# Altium PCB GTU-V1.0-20160325 .PcbDoc (part 4 of 5)
Units mil, origin at the board's own origin, x right, y up, seen from the top; angles counter-clockwise.
Board outline 6299.21 x 4330.71 mil, 4 copper layers (Top Layer, POWER, GND, Bottom Layer); 208 components, 165 nets, 695 pads, 348 vias.
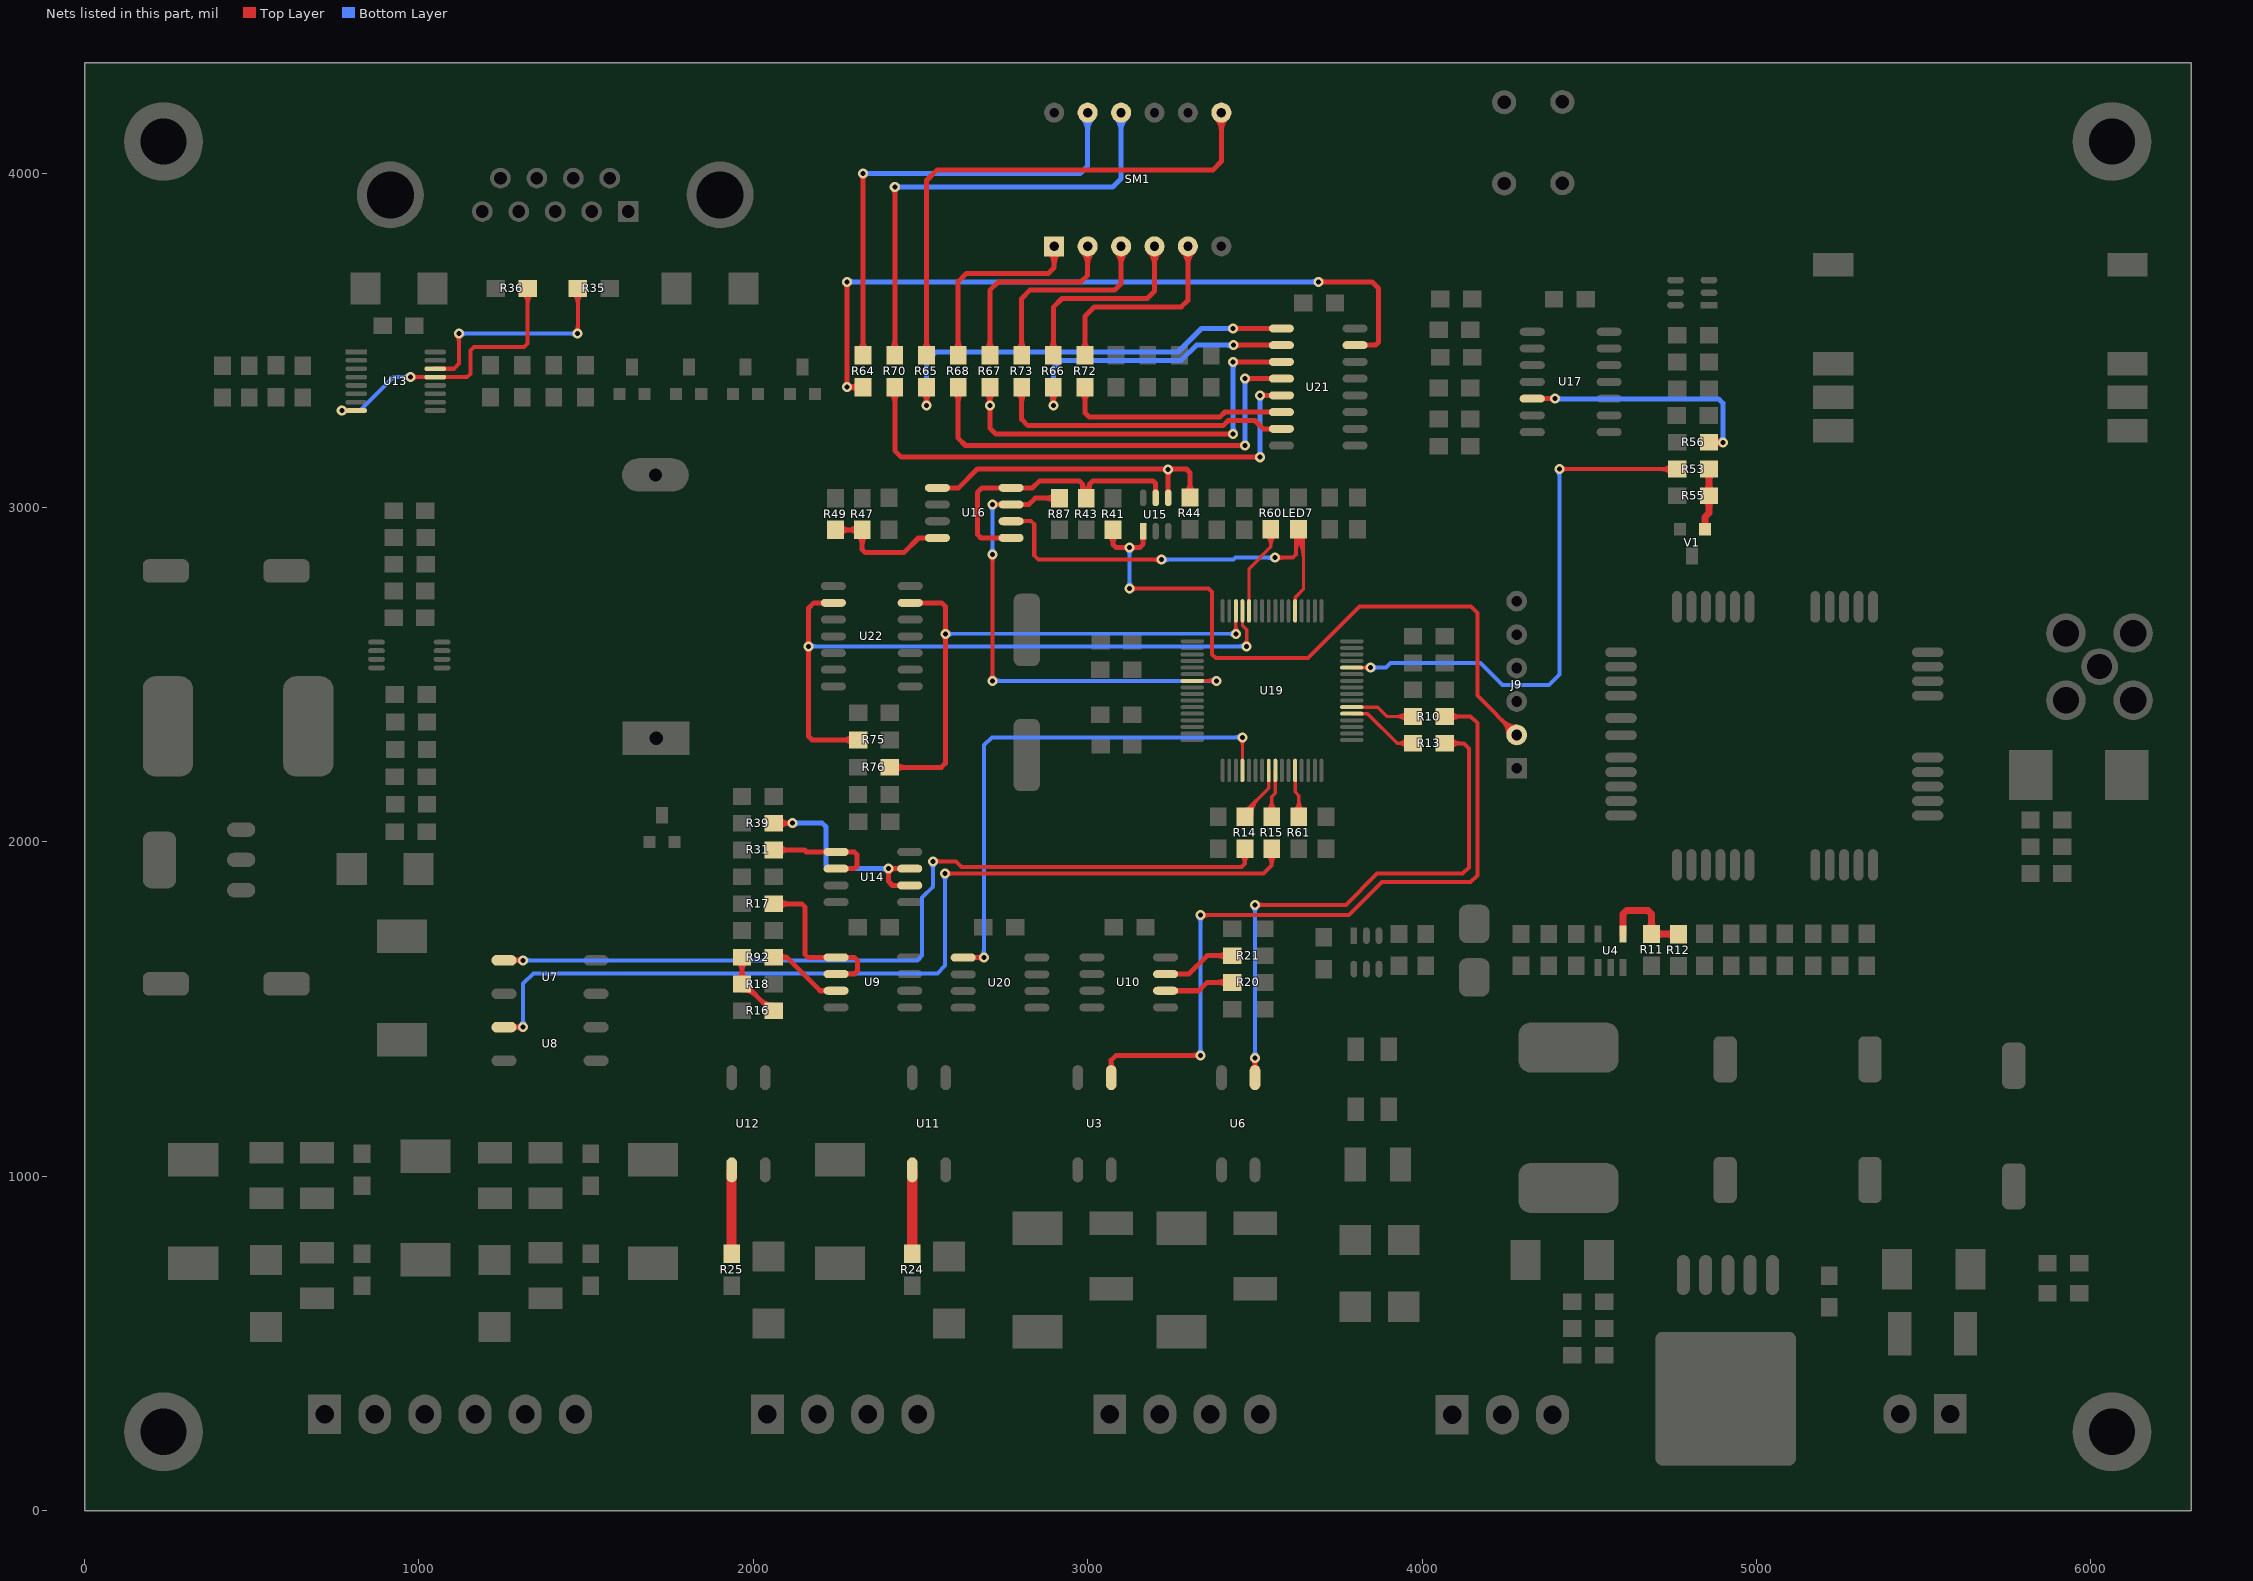
[diagram p6: the nets of this part, all layers, seen from the top]

## Via types
v1: diameter 30, hole 15, Top Layer to Bottom Layer, 262 vias
v2: diameter 40, hole 20, Top Layer to Bottom Layer, 36 vias
v3: diameter 40, hole 40, Top Layer to Bottom Layer, 16 vias
v4: diameter 80, hole 40, Top Layer to Bottom Layer, 12 vias
v5: diameter 60, hole 30, Top Layer to Bottom Layer, 11 vias
v6: diameter 50, hole 25, Top Layer to Bottom Layer, 10 vias
v7: diameter 70, hole 35, Top Layer to Bottom Layer, 1 vias

## Nets (pads, with @x,y where several pads share a name; then routed paths per layer and width w, separated by ;. In a path a pad name is that pad's centre, name@x,y a point inside that pad or via, vN(x,y) a via of type N, cw(c..) or ccw(c..) an arc to the next point about the centre after c; other vN are vias at no path point) (continued)
NetR10_2: R10.2 U3.1 | length 2653.3
  Top Layer w12: v1(3337,1781) 3781,1781 3880,1880 4145,1880 4165,1900 4165,2355 4145,2375 R10.2@4067.6,2375 ; 3358.73,1781 cw(c3358.73,1802.73) 3343.36,1787.36 ccw(c3358.73,1802.73) 3358.73,1781 ; 3358.73,1781 ccw(c3358.73,1759.27) 3343.36,1774.64 cw(c3358.73,1759.27) 3358.73,1781 ; 4115.97,2375 cw(c4115.97,2420.87) 4083.53,2388.44 ccw(c4115.97,2420.87) 4115.97,2375 ; 4115.97,2375 ccw(c4115.97,2329.13) 4083.53,2361.56 cw(c4115.97,2329.13) 4115.97,2375
  Top Layer w15: U3.1@3070.21,1295 3070.21,1347.21 3085,1362 v1(3337,1362) ; 3070.21,1337.02 cw(c3049.69,1337.02) 3064.2,1322.51 ccw(c3049.69,1337.02) 3070.21,1337.02 ; 3070.21,1337.02 ccw(c3090.73,1337.02) 3076.22,1322.51 cw(c3090.73,1337.02) 3070.21,1337.02 ; 3318.89,1362 cw(c3318.89,1343.89) 3331.7,1356.7 ccw(c3318.89,1343.89) 3318.89,1362 ; 3318.89,1362 ccw(c3318.89,1380.11) 3331.7,1367.3 cw(c3318.89,1380.11) 3318.89,1362
  Bottom Layer w12: v1(3337,1362) v1@3337,1782 ; 3337,1383.73 cw(c3315.27,1383.73) 3330.64,1368.36 ccw(c3315.27,1383.73) 3337,1383.73 ; 3337,1383.73 ccw(c3358.73,1383.73) 3343.36,1368.36 cw(c3358.73,1383.73) 3337,1383.73 ; 3337,1759.27 cw(c3358.73,1759.27) 3343.36,1774.64 ccw(c3358.73,1759.27) 3337,1759.27 ; 3337,1759.27 ccw(c3315.27,1759.27) 3330.64,1774.64 cw(c3315.27,1759.27) 3337,1759.27
NetR11_2: R11.2 R12.1 U4.5 | length 635.3
  Top Layer w20: U4.5@4600.83,1724.78 4600.83,1784.78 4610.83,1794.78 4675.83,1794.78 4685.83,1784.78 R11.2@4685.83,1724.78 4765.44,1724.78 R12.1@4766.21,1724 ; 4685.83,1763.49 cw(c4649.61,1763.49) 4675.22,1737.88 ccw(c4649.61,1763.49) 4685.83,1763.49 ; 4685.83,1763.49 ccw(c4722.04,1763.49) 4696.43,1737.88 cw(c4722.04,1763.49) 4685.83,1763.49 ; 4722.04,1724.78 cw(c4722.04,1760.99) 4696.43,1735.38 ccw(c4722.04,1760.99) 4722.04,1724.78 ; 4722.04,1724.78 ccw(c4722.04,1688.56) 4696.43,1714.17 cw(c4722.04,1688.56) 4722.04,1724.78 ; 4728.13,1724.78 cw(c4728.13,1685.91) 4755.61,1713.39 ccw(c4728.13,1685.91) 4728.13,1724.78 ; 4731.87,1724.78 ccw(c4731.87,1758.34) 4755.61,1734.61 cw(c4731.87,1758.34) 4731.87,1724.78
NetR13_2: R13.2 U6.1 | length 2108
  Top Layer w12: v1(3500.21,1812) 3772,1812 3865,1905 4121,1905 4140,1924 4140,2280 4125,2295 R13.2@4067.6,2295 ; 3521.94,1812 cw(c3521.94,1833.73) 3506.58,1818.36 ccw(c3521.94,1833.73) 3521.94,1812 ; 3521.94,1812 ccw(c3521.94,1790.27) 3506.58,1805.64 cw(c3521.94,1790.27) 3521.94,1812 ; 4115.97,2295 cw(c4115.97,2340.87) 4083.53,2308.44 ccw(c4115.97,2340.87) 4115.97,2295 ; 4115.97,2295 ccw(c4115.97,2249.13) 4083.53,2281.56 cw(c4115.97,2249.13) 4115.97,2295
  Top Layer w15: U6.1@3500.21,1295 v1(3500.21,1354) ; 3500.21,1335.89 cw(c3518.32,1335.89) 3505.52,1348.7 ccw(c3518.32,1335.89) 3500.21,1335.89 ; 3500.21,1335.89 ccw(c3482.11,1335.89) 3494.91,1348.7 cw(c3482.11,1335.89) 3500.21,1335.89 ; 3500.21,1337.02 cw(c3479.69,1337.02) 3494.2,1322.51 ccw(c3479.69,1337.02) 3500.21,1337.02 ; 3500.21,1337.02 ccw(c3520.73,1337.02) 3506.22,1322.51 cw(c3520.73,1337.02) 3500.21,1337.02
  Bottom Layer w12: v1(3500.21,1354) v1(3500.21,1812) ; 3500.21,1375.73 cw(c3478.48,1375.73) 3493.85,1360.36 ccw(c3478.48,1375.73) 3500.21,1375.73 ; 3500.21,1375.73 ccw(c3521.94,1375.73) 3506.58,1360.36 cw(c3521.94,1375.73) 3500.21,1375.73 ; 3500.21,1790.27 cw(c3521.94,1790.27) 3506.58,1805.64 ccw(c3521.94,1790.27) 3500.21,1790.27 ; 3500.21,1790.27 ccw(c3478.48,1790.27) 3493.85,1805.64 cw(c3478.48,1790.27) 3500.21,1790.27
NetR14_2: R14.2 U7.1 | length 2995.1
  Top Layer w12: v1(2537,1942) 2606,1942 2623,1925 3460,1925 3470,1935 ; R14.2@3470,1980 3470,1935 ; 2558.73,1942 cw(c2558.73,1963.73) 2543.36,1948.36 ccw(c2558.73,1963.73) 2558.73,1942 ; 2558.73,1942 ccw(c2558.73,1920.27) 2543.36,1935.64 cw(c2558.73,1920.27) 2558.73,1942 ; 3470,1935 cw(c3508.03,1935) 3482.67,1963.34 ccw(c3508.03,1935) 3470,1935 ; 3470,1935 ccw(c3431.97,1935) 3457.33,1963.34 cw(c3431.97,1935) 3470,1935
  Top Layer w15: U7.1@1254.21,1646 v1(1311,1646) ; 1292.89,1646 cw(c1292.89,1627.89) 1305.7,1640.7 ccw(c1292.89,1627.89) 1292.89,1646 ; 1292.89,1646 ccw(c1292.89,1664.11) 1305.7,1651.3 cw(c1292.89,1664.11) 1292.89,1646 ; v1@1296.23,1646 cw(c1296.23,1666.52) 1281.72,1652.01 ccw(c1296.23,1666.52) v1@1296.23,1646 ; v1@1296.23,1646 ccw(c1296.23,1625.48) 1281.72,1639.99 cw(c1296.23,1625.48) v1@1296.23,1646
  Bottom Layer w12: v1(1311,1646) 2491,1646 2505,1660 2505,1834 2537,1866 v1(2537,1942) ; 1332.73,1646 cw(c1332.73,1667.73) 1317.36,1652.36 ccw(c1332.73,1667.73) 1332.73,1646 ; 1332.73,1646 ccw(c1332.73,1624.27) 1317.36,1639.64 cw(c1332.73,1624.27) 1332.73,1646 ; 2537,1920.27 cw(c2558.73,1920.27) 2543.36,1935.64 ccw(c2558.73,1920.27) 2537,1920.27 ; 2537,1920.27 ccw(c2515.27,1920.27) 2530.64,1935.64 cw(c2515.27,1920.27) 2537,1920.27
NetR15_2: R15.2 U8.1 | length 3252.7
  Top Layer w12: v1@2575,1905 3525,1905 3550,1930 R15.2@3550,1980 ; 3550,1931.63 cw(c3595.87,1931.63) 3563.44,1964.06 ccw(c3595.87,1931.63) 3550,1931.63 ; 3550,1931.63 ccw(c3504.13,1931.63) 3536.56,1964.06 cw(c3504.13,1931.63) 3550,1931.63 ; v1@2579.36,1899.64 cw(c2592.31,1886.69) 2592.31,1905 ccw(c2592.31,1886.69) v1@2579.36,1899.64 ; v1@2579.36,1912.36 ccw(c2597.14,1930.14) 2597.14,1905 cw(c2597.14,1930.14) v1@2579.36,1912.36
  Top Layer w15: U8.1@1254.21,1446 v1(1311,1446) ; 1292.89,1446 cw(c1292.89,1427.89) 1305.7,1440.7 ccw(c1292.89,1427.89) 1292.89,1446 ; 1292.89,1446 ccw(c1292.89,1464.11) 1305.7,1451.3 cw(c1292.89,1464.11) 1292.89,1446 ; v1@1296.23,1446 cw(c1296.23,1466.52) 1281.72,1452.01 ccw(c1296.23,1466.52) v1@1296.23,1446 ; v1@1296.23,1446 ccw(c1296.23,1425.48) 1281.72,1439.99 cw(c1296.23,1425.48) v1@1296.23,1446
  Bottom Layer w12: v1(1311,1446) 1311,1576 1342,1607 2550,1607 2573,1630 v1(2573,1906) ; 1311,1467.73 cw(c1289.27,1467.73) 1304.64,1452.36 ccw(c1289.27,1467.73) 1311,1467.73 ; 1311,1467.73 ccw(c1332.73,1467.73) 1317.36,1452.36 cw(c1332.73,1467.73) 1311,1467.73 ; 2573,1884.27 cw(c2594.73,1884.27) 2579.36,1899.64 ccw(c2594.73,1884.27) 2573,1884.27 ; 2573,1884.27 ccw(c2551.27,1884.27) 2566.64,1899.64 cw(c2551.27,1884.27) 2573,1884.27
NetR16_1: R16.1 R18.2 R92.2 | length 739.1
  Top Layer w15: R18.2@1966.21,1575 R92.2@1966.21,1655 ; R18.2@1966.21,1583 R16.1@2046.21,1503 ; R16.1@2046.21,1495 R16.1@2061.21,1495 ; 1966.21,1612.75 cw(c2008.46,1612.75) 1978.59,1642.63 ccw(c2008.46,1612.75) 1966.21,1612.75 ; 1966.21,1612.75 ccw(c1923.96,1612.75) 1953.84,1642.63 cw(c1923.96,1612.75) 1966.21,1612.75 ; 1966.21,1617.25 cw(c1923.96,1617.25) 1953.84,1587.37 ccw(c1923.96,1617.25) 1966.21,1617.25 ; 1966.21,1617.25 ccw(c2008.46,1617.25) 1978.59,1587.37 cw(c2008.46,1617.25) 1966.21,1617.25 ; R18.2@1968.71,1557.5 cw(c1968.71,1501.97) 2007.98,1541.24 ccw(c1968.71,1501.97) R18.2@1968.71,1557.5 ; R18.2@1986.21,1575 ccw(c2015.18,1575) 1994.7,1554.51 cw(c2015.18,1575) R18.2@1986.21,1575 ; 2021.16,1528.06 ccw(c2058.71,1565.61) 2058.71,1512.5 cw(c2058.71,1565.61) 2021.16,1528.06 ; 2032.02,1517.19 cw(c2009.83,1495) 2041.21,1495 ccw(c2009.83,1495) 2032.02,1517.19
NetR17_1: R17.1 U9.1 U9.2 | length 634.8
  Top Layer w15: R17.1@2061.21,1815 2145,1815 2154,1806 2154,1664 2163,1655 2302,1655 2311,1646 2311,1614 2302,1605 U9.2@2247.6,1605 ; 2105.96,1815 cw(c2105.96,1857.25) 2076.09,1827.37 ccw(c2105.96,1857.25) 2105.96,1815 ; 2105.96,1815 ccw(c2105.96,1772.75) 2076.09,1802.63 cw(c2105.96,1772.75) 2105.96,1815
NetR20_2: R20.2 U10.6 | length 343.1
  Top Layer w15: U10.6@3232.6,1555 3332,1555 3357,1580 R20.2@3432.6,1580 ; 3387.85,1580 cw(c3387.85,1537.75) 3417.72,1567.63 ccw(c3387.85,1537.75) 3387.85,1580 ; 3387.85,1580 ccw(c3387.85,1622.25) 3417.72,1592.37 cw(c3387.85,1622.25) 3387.85,1580
NetR21_2: R21.2 U10.7 | length 355.5
  Top Layer w15: U10.7@3232.6,1605 3302,1605 3357,1660 R21.2@3432.6,1660 ; 3387.85,1660 cw(c3387.85,1617.75) 3417.72,1647.63 ccw(c3387.85,1617.75) 3387.85,1660 ; 3387.85,1660 ccw(c3387.85,1702.25) 3417.72,1672.37 cw(c3387.85,1702.25) 3387.85,1660
NetR24_2: R24.2 U11.1 | length 251.4
  Top Layer w30: R24.2@2475.21,768 U11.1@2475.21,1019.41
NetR25_2: R25.2 U12.1 | length 251.4
  Top Layer w30: R25.2@1935.21,768 U12.1@1935.21,1019.41
NetR31_2: R31.2 U14.1 U14.2 | length 487
  Top Layer w15: R31.2@2061.21,1976 2153,1976 2159,1970 2302,1970 2310,1962 2310,1928 2302,1920 U14.2@2247.6,1920 ; 2105.96,1976 cw(c2105.96,2018.25) 2076.09,1988.37 ccw(c2105.96,2018.25) 2105.96,1976 ; 2105.96,1976 ccw(c2105.96,1933.75) 2076.09,1963.63 cw(c2105.96,1933.75) 2105.96,1976
NetR35_2: R35.2 U13.14 | length 1073.9
  Top Layer w12: U13.14@1048.71,3415 1104.21,3415 1119.21,3430 v1(1119.21,3520) ; v1@1475.21,3520 R35.2@1475.21,3655 ; 1119.21,3498.27 cw(c1140.94,3498.27) 1125.58,3513.64 ccw(c1140.94,3498.27) 1119.21,3498.27 ; 1119.21,3498.27 ccw(c1097.48,3498.27) 1112.85,3513.64 cw(c1097.48,3498.27) 1119.21,3498.27 ; 1475.21,3609.13 cw(c1521.08,3609.13) 1488.65,3641.56 ccw(c1521.08,3609.13) 1475.21,3609.13 ; 1475.21,3609.13 ccw(c1429.34,3609.13) 1461.78,3641.56 cw(c1429.34,3609.13) 1475.21,3609.13 ; v1@1467.85,3526.36 ccw(c1450.07,3544.14) 1475.21,3544.14 cw(c1450.07,3544.14) v1@1467.85,3526.36 ; 1475.21,3539.31 ccw(c1493.53,3539.31) 1480.58,3526.36 cw(c1493.53,3539.31) 1475.21,3539.31
  Bottom Layer w12: v1(1119.21,3520) v1(1474.21,3520) ; 1140.94,3520 cw(c1140.94,3541.73) 1125.58,3526.36 ccw(c1140.94,3541.73) 1140.94,3520 ; 1140.94,3520 ccw(c1140.94,3498.27) 1125.58,3513.64 cw(c1140.94,3498.27) 1140.94,3520 ; 1452.48,3520 cw(c1452.48,3498.27) 1467.85,3513.64 ccw(c1452.48,3498.27) 1452.48,3520 ; 1452.48,3520 ccw(c1452.48,3541.73) 1467.85,3526.36 cw(c1452.48,3541.73) 1452.48,3520
NetR36_2: R36.2 U13.8 U13.13 | length 1304.9
  Top Layer w12: v1(769.21,3290) U13.8@812.71,3290 ; v1(974.21,3390) 1144.21,3390 1154.21,3400 1154.21,3470 1164.21,3480 1314.21,3480 1325.21,3491 R36.2@1325.21,3655 ; U13.8@790.94,3290 cw(c790.94,3311.73) 775.58,3296.36 ccw(c790.94,3311.73) U13.8@790.94,3290 ; U13.8@790.94,3290 ccw(c790.94,3268.27) 775.58,3283.64 cw(c790.94,3268.27) U13.8@790.94,3290 ; 995.94,3390 cw(c995.94,3411.73) 980.58,3396.36 ccw(c995.94,3411.73) 995.94,3390 ; 995.94,3390 ccw(c995.94,3368.27) 980.58,3383.64 cw(c995.94,3368.27) 995.94,3390 ; 1325.21,3609.13 cw(c1371.08,3609.13) 1338.65,3641.56 ccw(c1371.08,3609.13) 1325.21,3609.13 ; 1325.21,3609.13 ccw(c1279.34,3609.13) 1311.78,3641.56 cw(c1279.34,3609.13) 1325.21,3609.13
  Bottom Layer w12: v1(769.21,3290) 824.21,3290 924.21,3390 v1(974.21,3390) ; 790.94,3290 cw(c790.94,3311.73) 775.58,3296.36 ccw(c790.94,3311.73) 790.94,3290 ; 790.94,3290 ccw(c790.94,3268.27) 775.58,3283.64 cw(c790.94,3268.27) 790.94,3290 ; 952.48,3390 cw(c952.48,3368.27) 967.85,3383.64 ccw(c952.48,3368.27) 952.48,3390 ; 952.48,3390 ccw(c952.48,3411.73) 967.85,3396.36 cw(c952.48,3411.73) 952.48,3390
NetR39_2: R39.2 U14.6 U14.7 | length 1053.8
  Top Layer w15: R39.2@2061.21,2056 v1(2117,2056) ; U14.6@2467.6,1870 2416,1870 2404,1882 v1(2404,1920) U14.7@2467.6,1920 ; 2098.89,2056 cw(c2098.89,2037.89) 2111.7,2050.7 ccw(c2098.89,2037.89) 2098.89,2056 ; 2098.89,2056 ccw(c2098.89,2074.11) 2111.7,2061.3 cw(c2098.89,2074.11) 2098.89,2056 ; v1@2105.96,2056 cw(c2105.96,2098.25) 2076.09,2068.37 ccw(c2105.96,2098.25) v1@2105.96,2056 ; v1@2105.96,2056 ccw(c2105.96,2013.75) 2076.09,2043.63 cw(c2105.96,2013.75) v1@2105.96,2056 ; 2404,1901.89 cw(c2422.11,1901.89) v1@2409.3,1914.7 ; 2404,1901.89 ccw(c2385.89,1901.89) 2398.7,1914.7 cw(c2385.89,1901.89) 2404,1901.89 ; 2404,1901.89 cw(c2422.11,1901.89) v1@2409.3,1914.7 ; v1@2409.3,1914.7 cw(c2422.11,1901.89) 2422.11,1920 ; v1@2409.3,1914.7 cw(c2422.11,1901.89) 2422.11,1920 ; 2422.11,1920 cw(c2422.11,1938.11) 2409.3,1925.3 ccw(c2422.11,1938.11) 2422.11,1920
  Bottom Layer w15: v1(2117,2056) 2206,2056 2217,2045 2217,1930 2227,1920 v1(2404,1920) ; 2135.11,2056 cw(c2135.11,2074.11) 2122.3,2061.3 ccw(c2135.11,2074.11) 2135.11,2056 ; 2135.11,2056 ccw(c2135.11,2037.89) 2122.3,2050.7 cw(c2135.11,2037.89) 2135.11,2056 ; 2385.89,1920 cw(c2385.89,1901.89) 2398.7,1914.7 ccw(c2385.89,1901.89) 2385.89,1920 ; 2385.89,1920 ccw(c2385.89,1938.11) 2398.7,1925.3 cw(c2385.89,1938.11) 2385.89,1920
NetR43_1: R43.1 U15.5 U16.5 U16.8 | length 1020.6
  Top Layer w15: U16.5@2770.6,2909 2681,2909 2670,2920 2670,3045 2684,3059 2835,3059 2856,3080 2975,3080 2985,3070 ; R43.1@2995.6,3028 2993.6,3030 2985,3030 2985,3070 ; R43.1@3010,3035 3005,3040 3005,3070 ; U15.5@3203.1,3029 3203.1,3071.9 3195,3080 3015,3080 3005,3070 ; 2985,3070 ccw(c3009.31,3070) 3001.34,3047.03 cw(c3009.31,3070) 2985,3070 ; 3005,3070 cw(c2980.05,3070) 2989.19,3046.78 ccw(c2980.05,3070) 3005,3070
NetR44_1: R44.1 U15.4 U16.1 | length 1245.8
  Top Layer w15: U16.1@2550.6,3059 2614,3059 2670,3115 3295,3115 3305.6,3104.4 R44.1@3305.6,3030 ; U15.4@3240.6,3029 v1(3240.6,3114.4) ; v1@3235.3,3109.1 ccw(c3221.05,3094.85) 3221.05,3115 cw(c3221.05,3094.85) v1@3235.3,3109.1 ; v1@3235.3,3109.1 cw(c3222.49,3096.3) 3240.6,3096.3 ; v1@3235.3,3109.1 cw(c3222.49,3096.3) 3240.6,3096.3 ; 3240.6,3096.3 cw(c3258.7,3096.3) v1@3245.9,3109.1 ; 3240.6,3096.3 cw(c3258.7,3096.3) v1@3245.9,3109.1 ; v1@3245.9,3109.1 cw(c3260.15,3094.85) 3260.15,3115 ccw(c3260.15,3094.85) v1@3245.9,3109.1 ; 3305.6,3074.75 cw(c3263.35,3074.75) 3293.22,3044.87 ccw(c3263.35,3074.75) 3305.6,3074.75 ; 3305.6,3074.75 ccw(c3347.85,3074.75) 3317.97,3044.87 cw(c3347.85,3074.75) 3305.6,3074.75 ; 3223.94,3115 ccw(c3223.94,3131.06) 3235.3,3119.7 cw(c3223.94,3131.06) 3223.94,3115 ; v1@3245.9,3119.7 ccw(c3257.26,3131.06) 3257.26,3115 cw(c3257.26,3131.06) v1@3245.9,3119.7
NetR47_1: R47.1 R49.2 U16.4 | length 783.9
  Top Layer w15: R49.2@2245.6,2933 R47.1@2325.6,2933 2325.6,2874.4 2335,2865 2450,2865 2494,2909 U16.4@2550.6,2909 ; 2283.35,2933 cw(c2283.35,2890.75) 2313.22,2920.63 ccw(c2283.35,2890.75) 2283.35,2933 ; 2283.35,2933 ccw(c2283.35,2975.25) 2313.22,2945.37 cw(c2283.35,2975.25) 2283.35,2933 ; 2287.85,2933 cw(c2287.85,2975.25) 2257.97,2945.37 ccw(c2287.85,2975.25) 2287.85,2933 ; 2287.85,2933 ccw(c2287.85,2890.75) 2257.97,2920.63 cw(c2287.85,2890.75) 2287.85,2933 ; 2325.6,2888.25 cw(c2367.85,2888.25) 2337.97,2918.13 ccw(c2367.85,2888.25) 2325.6,2888.25 ; 2325.6,2888.25 ccw(c2283.35,2888.25) 2313.22,2918.13 cw(c2283.35,2888.25) 2325.6,2888.25
NetR53_2: R53.2 R55.1 V1.1 | length 586.9
  Top Layer w20: V1.1@4845.6,2935 4845.6,2971.39 4857.6,2983.39 R53.2@4857.6,3115 ; 4845.6,2954.31 cw(c4826.28,2954.31) 4839.94,2940.66 ccw(c4826.28,2954.31) 4845.6,2954.31 ; 4845.6,2954.31 ccw(c4864.91,2954.31) 4851.26,2940.66 cw(c4864.91,2954.31) 4845.6,2954.31 ; 4857.6,2998.79 cw(c4893.81,2998.79) 4868.21,3024.39 ccw(c4893.81,2998.79) 4857.6,2998.79 ; 4857.6,2998.79 ccw(c4821.39,2998.79) 4846.99,3024.39 cw(c4821.39,2998.79) 4857.6,2998.79 ; 4857.6,3071.21 cw(c4821.39,3071.21) 4846.99,3045.61 ccw(c4821.39,3071.21) 4857.6,3071.21 ; 4857.6,3071.21 ccw(c4893.81,3071.21) 4868.21,3045.61 cw(c4893.81,3071.21) 4857.6,3071.21 ; 4857.6,3078.79 cw(c4893.81,3078.79) 4868.21,3104.39 ccw(c4893.81,3078.79) 4857.6,3078.79 ; 4857.6,3078.79 ccw(c4821.39,3078.79) 4846.99,3104.39 cw(c4821.39,3078.79) 4857.6,3078.79
NetR56_2: R56.2 U17.5 | length 1018.4
  Top Layer w15: U17.5@4329.21,3325.61 v1(4397.6,3325.61) ; 4379.49,3325.61 cw(c4379.49,3307.51) 4392.3,3320.31 ccw(c4379.49,3307.51) 4379.49,3325.61 ; 4379.49,3325.61 ccw(c4379.49,3343.72) 4392.3,3330.92 cw(c4379.49,3343.72) 4379.49,3325.61
  Top Layer w20: R56.2@4857.6,3195 v1(4899.21,3195) ; v1@4896.31,3195 cw(c4896.31,3231.21) 4870.71,3205.61 ccw(c4896.31,3231.21) v1@4896.31,3195 ; v1@4896.31,3195 ccw(c4896.31,3158.79) 4870.71,3184.39 cw(c4896.31,3158.79) v1@4896.31,3195
  Bottom Layer w15: v1@4397.6,3325 4886.21,3325 4899.21,3312 v1(4899.21,3195) ; 4899.21,3213.11 cw(c4881.11,3213.11) 4893.91,3200.3 ccw(c4881.11,3213.11) 4899.21,3213.11 ; 4899.21,3213.11 ccw(c4917.32,3213.11) 4904.52,3200.3 cw(c4917.32,3213.11) 4899.21,3213.11 ; v1@4402.9,3320.31 cw(c4414.22,3308.99) 4414.22,3325 ccw(c4414.22,3308.99) v1@4402.9,3320.31 ; v1@4402.9,3330.92 ccw(c4417.19,3345.2) 4417.19,3325 cw(c4417.19,3345.2) v1@4402.9,3330.92
NetR60_2: R60.2 U19.60 | length 422.9
  Top Layer w10: U19.60@3482.2,2690.87 3482.2,2817.2 3547.6,2882.6 R60.2@3547.6,2935 ; 3547.6,2884.22 cw(c3595.88,2884.22) 3561.74,2918.36 ccw(c3595.88,2884.22) 3547.6,2884.22 ; 3547.6,2884.22 ccw(c3499.31,2884.22) 3533.46,2918.36 cw(c3499.31,2884.22) 3547.6,2884.22
NetR61_1: R61.1 U19.28 | length 295.2
  Top Layer w10: U19.28@3620,2213.86 3620,2150 3631.35,2138.65 R61.1@3631.35,2075 ; 3631.35,2125.78 cw(c3583.06,2125.78) 3617.21,2091.64 ccw(c3583.06,2125.78) 3631.35,2125.78 ; 3631.35,2125.78 ccw(c3679.63,2125.78) 3645.49,2091.64 cw(c3679.63,2125.78) 3631.35,2125.78
NetR64_1: R64.1 U21.15 | length 2670.1
  Top Layer w15: v1(2280,3675) v1(2280,3360) R64.1@2328.05,3360 ; v1(3690,3675) 3850,3675 3870,3655 3870,3495 3860.39,3485.39 U21.15@3799.21,3485.39 ; 2280,3378.11 cw(c2261.89,3378.11) 2274.7,3365.3 ccw(c2261.89,3378.11) 2280,3378.11 ; 2280,3378.11 ccw(c2298.11,3378.11) v1@2285.3,3365.3 ; 2280,3378.11 ccw(c2298.11,3378.11) v1@2285.3,3365.3 ; 2280,3656.89 cw(c2298.11,3656.89) 2285.3,3669.7 ccw(c2298.11,3656.89) 2280,3656.89 ; 2280,3656.89 ccw(c2261.89,3656.89) 2274.7,3669.7 cw(c2261.89,3656.89) 2280,3656.89 ; v1@2285.3,3365.3 ccw(c2298.11,3378.11) 2298.11,3360 ; v1@2285.3,3365.3 ccw(c2298.11,3378.11) 2298.11,3360 ; v1@2285.8,3360 cw(c2285.8,3317.75) 2315.67,3347.63 ccw(c2285.8,3317.75) v1@2285.8,3360 ; v1@2285.8,3360 ccw(c2285.8,3402.25) 2315.67,3372.37 cw(c2285.8,3402.25) v1@2285.8,3360 ; 2298.11,3360 ccw(c2298.11,3341.89) 2285.3,3354.7 cw(c2298.11,3341.89) 2298.11,3360 ; 3708.11,3675 cw(c3708.11,3693.11) 3695.3,3680.3 ccw(c3708.11,3693.11) 3708.11,3675 ; 3708.11,3675 ccw(c3708.11,3656.89) 3695.3,3669.7 cw(c3708.11,3656.89) 3708.11,3675
  Bottom Layer w15: v1(2280,3675) v1(3690,3675) ; 2298.11,3675 cw(c2298.11,3693.11) 2285.3,3680.3 ccw(c2298.11,3693.11) 2298.11,3675 ; 2298.11,3675 ccw(c2298.11,3656.89) 2285.3,3669.7 cw(c2298.11,3656.89) 2298.11,3675 ; 3671.89,3675 cw(c3671.89,3656.89) 3684.7,3669.7 ccw(c3671.89,3656.89) 3671.89,3675 ; 3671.89,3675 ccw(c3671.89,3693.11) 3684.7,3680.3 cw(c3671.89,3693.11) 3671.89,3675
NetR64_2: R64.2 SM1.11 | length 1801.4
  Top Layer w15: R64.2@2328.05,3455 v1(2328.05,3998.83) ; 2328.05,3499.75 cw(c2285.8,3499.75) 2315.67,3469.87 ccw(c2285.8,3499.75) 2328.05,3499.75 ; 2328.05,3499.75 ccw(c2370.29,3499.75) 2340.42,3469.87 cw(c2370.29,3499.75) 2328.05,3499.75 ; 2328.05,3980.73 cw(c2346.15,3980.73) 2333.35,3993.53 ccw(c2346.15,3980.73) 2328.05,3980.73 ; 2328.05,3980.73 ccw(c2309.94,3980.73) 2322.74,3993.53 cw(c2309.94,3980.73) 2328.05,3980.73
  Bottom Layer w15: v1(2328.05,3998.83) 2976.83,3998.83 2999.6,4021.6 SM1.11@2999.6,4181 ; 2346.15,3998.83 cw(c2346.15,4016.94) 2333.35,4004.14 ccw(c2346.15,4016.94) 2346.15,3998.83 ; 2346.15,3998.83 ccw(c2346.15,3980.73) 2333.35,3993.53 cw(c2346.15,3980.73) 2346.15,3998.83 ; 2999.6,4126.68 cw(c3053.92,4126.68) 3015.51,4165.09 ccw(c3053.92,4126.68) 2999.6,4126.68 ; 2999.6,4126.68 ccw(c2945.28,4126.68) 2983.69,4165.09 cw(c2945.28,4126.68) 2999.6,4126.68
NetR65_1: R65.1 U21.1 | length 1648.4
  Top Layer w15: v1(2517.71,3305.79) R65.1@2517.71,3360 ; v1(3434.61,3535.39) U21.1@3579.21,3535.39 ; v1@2517.71,3315.25 cw(c2559.96,3315.25) 2530.09,3345.13 ccw(c2559.96,3315.25) v1@2517.71,3315.25 ; v1@2517.71,3315.25 ccw(c2475.46,3315.25) 2505.34,3345.13 cw(c2475.46,3315.25) v1@2517.71,3315.25 ; 2517.71,3323.89 cw(c2499.61,3323.89) 2512.41,3311.09 ccw(c2499.61,3323.89) 2517.71,3323.89 ; 2517.71,3323.89 ccw(c2535.82,3323.89) 2523.02,3311.09 cw(c2535.82,3323.89) 2517.71,3323.89 ; 3452.72,3535.39 cw(c3452.72,3553.49) 3439.92,3540.69 ccw(c3452.72,3553.49) 3452.72,3535.39 ; 3452.72,3535.39 ccw(c3452.72,3517.28) 3439.92,3530.08 cw(c3452.72,3517.28) 3452.72,3535.39
  Bottom Layer w15: v1(2517.71,3305.79) 2517.71,3437.71 2545,3465 3270,3465 3340.39,3535.39 v1(3434.61,3535.39) ; 2517.71,3323.89 cw(c2499.61,3323.89) 2512.41,3311.09 ccw(c2499.61,3323.89) 2517.71,3323.89 ; 2517.71,3323.89 ccw(c2535.82,3323.89) 2523.02,3311.09 cw(c2535.82,3323.89) 2517.71,3323.89 ; 3416.51,3535.39 cw(c3416.51,3517.28) 3429.31,3530.08 ccw(c3416.51,3517.28) 3416.51,3535.39 ; 3416.51,3535.39 ccw(c3416.51,3553.49) 3429.31,3540.69 cw(c3416.51,3553.49) 3416.51,3535.39
NetR65_2: R65.2 SM1.7 | length 1877.9
  Top Layer w15: R65.2@2517.71,3455 2517.71,3977.71 2550,4010 3375,4010 3399.6,4034.6 SM1.7@3399.6,4181 ; 2517.71,3499.75 cw(c2475.46,3499.75) 2505.34,3469.87 ccw(c2475.46,3499.75) 2517.71,3499.75 ; 2517.71,3499.75 ccw(c2559.96,3499.75) 2530.09,3469.87 cw(c2559.96,3499.75) 2517.71,3499.75 ; 3399.6,4126.68 cw(c3453.92,4126.68) 3415.51,4165.09 ccw(c3453.92,4126.68) 3399.6,4126.68 ; 3399.6,4126.68 ccw(c3345.28,4126.68) 3383.69,4165.09 cw(c3345.28,4126.68) 3399.6,4126.68
NetR66_1: R66.1 U21.2 | length 1236.2
  Top Layer w15: v1(2897.05,3305.79) R66.1@2897.05,3360 ; v1(3435.39,3485.39) U21.2@3579.21,3485.39 ; v1@2897.05,3315.25 cw(c2939.29,3315.25) 2909.42,3345.13 ccw(c2939.29,3315.25) v1@2897.05,3315.25 ; v1@2897.05,3315.25 ccw(c2854.8,3315.25) 2884.67,3345.13 cw(c2854.8,3315.25) v1@2897.05,3315.25 ; 2897.05,3323.89 cw(c2878.94,3323.89) 2891.74,3311.09 ccw(c2878.94,3323.89) 2897.05,3323.89 ; 2897.05,3323.89 ccw(c2915.15,3323.89) 2902.35,3311.09 cw(c2915.15,3323.89) 2897.05,3323.89 ; 3453.49,3485.39 cw(c3453.49,3503.49) 3440.69,3490.69 ccw(c3453.49,3503.49) 3453.49,3485.39 ; 3453.49,3485.39 ccw(c3453.49,3467.28) 3440.69,3480.08 cw(c3453.49,3467.28) 3453.49,3485.39
  Bottom Layer w15: v1(2897.05,3305.79) 2897.05,3417.05 2920,3440 3280,3440 3325.39,3485.39 v1(3435.39,3485.39) ; 2897.05,3323.89 cw(c2878.94,3323.89) 2891.74,3311.09 ccw(c2878.94,3323.89) 2897.05,3323.89 ; 2897.05,3323.89 ccw(c2915.15,3323.89) 2902.35,3311.09 cw(c2915.15,3323.89) 2897.05,3323.89 ; 3417.28,3485.39 cw(c3417.28,3467.28) 3430.08,3480.08 ccw(c3417.28,3467.28) 3417.28,3485.39 ; 3417.28,3485.39 ccw(c3417.28,3503.49) 3430.08,3490.69 cw(c3417.28,3503.49) 3417.28,3485.39
NetR66_2: R66.2 SM1.4 | length 904.1
  Top Layer w15: R66.2@2897.05,3455 2897.05,3599.05 2923,3625 3178,3625 3199.6,3646.6 SM1.4@3199.6,3781 ; 2897.05,3499.75 cw(c2854.8,3499.75) 2884.67,3469.87 ccw(c2854.8,3499.75) 2897.05,3499.75 ; 2897.05,3499.75 ccw(c2939.29,3499.75) 2909.42,3469.87 cw(c2939.29,3499.75) 2897.05,3499.75 ; 3199.6,3726.68 cw(c3253.92,3726.68) 3215.51,3765.09 ccw(c3253.92,3726.68) 3199.6,3726.68 ; 3199.6,3726.68 ccw(c3145.28,3726.68) 3183.69,3765.09 cw(c3145.28,3726.68) 3199.6,3726.68
NetR67_1: R67.1 U21.3 | length 1690.9
  Top Layer w15: R67.1@2707.38,3360 2707.38,3237.62 2725,3220 v1(3435,3220) ; v1(3434.61,3435.39) U21.3@3579.21,3435.39 ; 2707.38,3287.68 cw(c2725.49,3287.68) 2712.68,3300.48 ccw(c2725.49,3287.68) 2707.38,3287.68 ; 2707.38,3287.68 ccw(c2689.27,3287.68) 2702.08,3300.48 cw(c2689.27,3287.68) 2707.38,3287.68 ; v1@2707.38,3315.25 cw(c2749.63,3315.25) 2719.75,3345.13 ccw(c2749.63,3315.25) v1@2707.38,3315.25 ; v1@2707.38,3315.25 ccw(c2665.13,3315.25) 2695,3345.13 cw(c2665.13,3315.25) v1@2707.38,3315.25 ; 2707.38,3323.89 cw(c2689.27,3323.89) 2702.08,3311.09 ccw(c2689.27,3323.89) 2707.38,3323.89 ; 2707.38,3323.89 ccw(c2725.49,3323.89) 2712.68,3311.09 cw(c2725.49,3323.89) 2707.38,3323.89 ; 3416.89,3220 cw(c3416.89,3201.89) 3429.7,3214.7 ccw(c3416.89,3201.89) 3416.89,3220 ; 3416.89,3220 ccw(c3416.89,3238.11) 3429.7,3225.3 cw(c3416.89,3238.11) 3416.89,3220 ; 3452.72,3435.39 cw(c3452.72,3453.49) 3439.92,3440.69 ccw(c3452.72,3453.49) 3452.72,3435.39 ; 3452.72,3435.39 ccw(c3452.72,3417.28) 3439.92,3430.08 cw(c3452.72,3417.28) 3452.72,3435.39
  Bottom Layer w15: v1(3435,3220) v1@3435,3435 ; 3435,3238.11 cw(c3416.89,3238.11) 3429.7,3225.3 ccw(c3416.89,3238.11) 3435,3238.11 ; 3435,3238.11 ccw(c3453.11,3238.11) 3440.3,3225.3 cw(c3453.11,3238.11) 3435,3238.11 ; v1@3429.31,3430.08 cw(c3415.58,3416.35) 3435,3416.35 ccw(c3415.58,3416.35) v1@3429.31,3430.08 ; 3435,3418.21 cw(c3451.79,3418.21) 3439.92,3430.08 ccw(c3451.79,3418.21) 3435,3418.21
  other v1: 2707.38,3305.79
NetR67_2: R67.2 SM1.2 | length 895.1
  Top Layer w15: R67.2@2707.38,3455 2707.38,3649.38 2733,3675 2980,3675 2999.6,3694.6 SM1.2@2999.6,3781 ; 2707.38,3499.75 cw(c2665.13,3499.75) 2695,3469.87 ccw(c2665.13,3499.75) 2707.38,3499.75 ; 2707.38,3499.75 ccw(c2749.63,3499.75) 2719.75,3469.87 cw(c2749.63,3499.75) 2707.38,3499.75 ; 2999.6,3726.68 cw(c3053.92,3726.68) 3015.51,3765.09 ccw(c3053.92,3726.68) 2999.6,3726.68 ; 2999.6,3726.68 ccw(c2945.28,3726.68) 2983.69,3765.09 cw(c2945.28,3726.68) 2999.6,3726.68
NetR68_1: R68.1 U21.4 | length 1688.6
  Top Layer w15: R68.1@2612.55,3360 2612.55,3207.45 2634.61,3185.39 v1(3470.39,3185.39) ; v1(3470.39,3385.39) U21.4@3579.21,3385.39 ; 2612.55,3315.25 cw(c2654.79,3315.25) 2624.92,3345.13 ccw(c2654.79,3315.25) 2612.55,3315.25 ; 2612.55,3315.25 ccw(c2570.3,3315.25) 2600.17,3345.13 cw(c2570.3,3315.25) 2612.55,3315.25 ; 3452.28,3185.39 cw(c3452.28,3167.28) 3465.08,3180.08 ccw(c3452.28,3167.28) 3452.28,3185.39 ; 3452.28,3185.39 ccw(c3452.28,3203.49) 3465.08,3190.69 cw(c3452.28,3203.49) 3452.28,3185.39 ; 3488.49,3385.39 cw(c3488.49,3403.49) 3475.69,3390.69 ccw(c3488.49,3403.49) 3488.49,3385.39 ; 3488.49,3385.39 ccw(c3488.49,3367.28) 3475.69,3380.08 cw(c3488.49,3367.28) 3488.49,3385.39
  Bottom Layer w15: v1(3470.39,3185.39) v1(3470.39,3385.39) ; 3470.39,3203.49 cw(c3452.28,3203.49) 3465.08,3190.69 ccw(c3452.28,3203.49) 3470.39,3203.49 ; 3470.39,3203.49 ccw(c3488.49,3203.49) 3475.69,3190.69 cw(c3488.49,3203.49) 3470.39,3203.49 ; 3470.39,3367.28 cw(c3488.49,3367.28) 3475.69,3380.08 ccw(c3488.49,3367.28) 3470.39,3367.28 ; 3470.39,3367.28 ccw(c3452.28,3367.28) 3465.08,3380.08 cw(c3452.28,3367.28) 3470.39,3367.28
NetR68_2: R68.2 SM1.1 | length 891.8
  Top Layer w15: R68.2@2612.55,3455 2612.55,3675.55 2637,3700 2882,3700 2899.6,3717.6 SM1.1@2899.6,3781 ; 2612.55,3499.75 cw(c2570.3,3499.75) 2600.17,3469.87 ccw(c2570.3,3499.75) 2612.55,3499.75 ; 2612.55,3499.75 ccw(c2654.79,3499.75) 2624.92,3469.87 cw(c2654.79,3499.75) 2612.55,3499.75 ; 2899.6,3726.68 cw(c2953.92,3726.68) 2915.51,3765.09 ccw(c2953.92,3726.68) 2899.6,3726.68 ; 2899.6,3726.68 ccw(c2845.28,3726.68) 2883.69,3765.09 cw(c2845.28,3726.68) 2899.6,3726.68
NetR70_1: R70.1 U21.5 | length 1899.6
  Top Layer w15: R70.1@2422.88,3360 2422.88,3170.12 2442.61,3150.39 v1(3515.39,3150.39) ; v1(3515.39,3335.39) U21.5@3579.21,3335.39 ; 2422.88,3315.25 cw(c2465.13,3315.25) 2435.25,3345.13 ccw(c2465.13,3315.25) 2422.88,3315.25 ; 2422.88,3315.25 ccw(c2380.63,3315.25) 2410.5,3345.13 cw(c2380.63,3315.25) 2422.88,3315.25 ; 3497.28,3150.39 cw(c3497.28,3132.28) 3510.08,3145.08 ccw(c3497.28,3132.28) 3497.28,3150.39 ; 3497.28,3150.39 ccw(c3497.28,3168.49) 3510.08,3155.69 cw(c3497.28,3168.49) 3497.28,3150.39 ; 3533.49,3335.39 cw(c3533.49,3353.49) 3520.69,3340.69 ccw(c3533.49,3353.49) 3533.49,3335.39 ; 3533.49,3335.39 ccw(c3533.49,3317.28) 3520.69,3330.08 cw(c3533.49,3317.28) 3533.49,3335.39
  Bottom Layer w15: v1(3515.39,3150.39) v1(3515.39,3335.39) ; 3515.39,3168.49 cw(c3497.28,3168.49) 3510.08,3155.69 ccw(c3497.28,3168.49) 3515.39,3168.49 ; 3515.39,3168.49 ccw(c3533.49,3168.49) 3520.69,3155.69 cw(c3533.49,3168.49) 3515.39,3168.49 ; 3515.39,3317.28 cw(c3533.49,3317.28) 3520.69,3330.08 ccw(c3533.49,3317.28) 3515.39,3317.28 ; 3515.39,3317.28 ccw(c3497.28,3317.28) 3510.08,3330.08 cw(c3497.28,3317.28) 3515.39,3317.28
NetR70_2: R70.2 SM1.10 | length 1805.3
  Top Layer w15: R70.2@2422.88,3455 v1(2422.88,3958.67) ; 2422.88,3499.75 cw(c2380.63,3499.75) 2410.5,3469.87 ccw(c2380.63,3499.75) 2422.88,3499.75 ; 2422.88,3499.75 ccw(c2465.13,3499.75) 2435.25,3469.87 cw(c2465.13,3499.75) 2422.88,3499.75 ; 2422.88,3940.56 cw(c2440.99,3940.56) 2428.18,3953.36 ccw(c2440.99,3940.56) 2422.88,3940.56 ; 2422.88,3940.56 ccw(c2404.77,3940.56) 2417.58,3953.36 cw(c2404.77,3940.56) 2422.88,3940.56
  Bottom Layer w15: v1(2422.88,3958.67) 3074.67,3958.67 3099.6,3983.6 SM1.10@3099.6,4181 ; 2440.99,3958.67 cw(c2440.99,3976.77) 2428.18,3963.97 ccw(c2440.99,3976.77) 2440.99,3958.67 ; 2440.99,3958.67 ccw(c2440.99,3940.56) 2428.18,3953.36 cw(c2440.99,3940.56) 2440.99,3958.67 ; 3099.6,4126.68 cw(c3153.92,4126.68) 3115.51,4165.09 ccw(c3153.92,4126.68) 3099.6,4126.68 ; 3099.6,4126.68 ccw(c3045.28,4126.68) 3083.69,4165.09 cw(c3045.28,4126.68) 3099.6,4126.68
NetR72_1: R72.1 U21.6 | length 808.7
  Top Layer w15: R72.1@2991.88,3360 2991.88,3283.12 3005,3270 3395,3270 3410.39,3285.39 U21.6@3579.21,3285.39 ; 2991.88,3315.25 cw(c3034.13,3315.25) 3004.25,3345.13 ccw(c3034.13,3315.25) 2991.88,3315.25 ; 2991.88,3315.25 ccw(c2949.63,3315.25) 2979.5,3345.13 cw(c2949.63,3315.25) 2991.88,3315.25
NetR72_2: R72.2 SM1.5 | length 909.1
  Top Layer w15: R72.2@2991.88,3455 2991.88,3571.88 3020,3600 3280,3600 3299.6,3619.6 SM1.5@3299.6,3781 ; 2991.88,3499.75 cw(c2949.63,3499.75) 2979.5,3469.87 ccw(c2949.63,3499.75) 2991.88,3499.75 ; 2991.88,3499.75 ccw(c3034.13,3499.75) 3004.25,3469.87 cw(c3034.13,3499.75) 2991.88,3499.75 ; 3299.6,3726.68 cw(c3353.92,3726.68) 3315.51,3765.09 ccw(c3353.92,3726.68) 3299.6,3726.68 ; 3299.6,3726.68 ccw(c3245.28,3726.68) 3283.69,3765.09 cw(c3245.28,3726.68) 3299.6,3726.68
NetR73_1: R73.1 U21.7 | length 1030.1
  Top Layer w15: R73.1@2802.21,3360 2802.21,3263.79 2821,3245 3405,3245 3420,3260 3500.39,3260 3525,3235.39 U21.7@3579.21,3235.39 ; 2802.21,3315.25 cw(c2844.46,3315.25) 2814.59,3345.13 ccw(c2844.46,3315.25) 2802.21,3315.25 ; 2802.21,3315.25 ccw(c2759.96,3315.25) 2789.84,3345.13 cw(c2759.96,3315.25) 2802.21,3315.25
NetR73_2: R73.2 SM1.3 | length 900.8
  Top Layer w15: R73.2@2802.21,3455 2802.21,3625.21 2827,3650 3080,3650 3099.6,3669.6 SM1.3@3099.6,3781 ; 2802.21,3499.75 cw(c2759.96,3499.75) 2789.84,3469.87 ccw(c2759.96,3499.75) 2802.21,3499.75 ; 2802.21,3499.75 ccw(c2844.46,3499.75) 2814.59,3469.87 cw(c2844.46,3499.75) 2802.21,3499.75 ; 3099.6,3726.68 cw(c3153.92,3726.68) 3115.51,3765.09 ccw(c3153.92,3726.68) 3099.6,3726.68 ; 3099.6,3726.68 ccw(c3045.28,3726.68) 3083.69,3765.09 cw(c3045.28,3726.68) 3099.6,3726.68
NetR92_1: R92.1 U9.3 | length 331.6
  Top Layer w15: R92.1@2061.21,1655 2100,1655 ; U9.3@2247.6,1555 2200,1555 2100,1655 ; 2100,1655 cw(c2100,1683.87) 2077.41,1665.9 ccw(c2100,1683.87) 2100,1655 ; 2100,1655 ccw(c2100,1626.13) 2077.41,1644.1 cw(c2100,1626.13) 2100,1655
NRST: R87.1 U16.7 U19.7 | length 2154.9
  Top Layer w10: U19.7@3312.6,2481.89 v1(3385,2481.89) ; 3360.86,2481.89 cw(c3360.86,2457.75) 3377.93,2474.82 ccw(c3360.86,2457.75) 3360.86,2481.89 ; 3360.86,2481.89 ccw(c3360.86,2506.03) 3377.93,2488.96 cw(c3360.86,2506.03) 3360.86,2481.89
  Top Layer w12: v1@2715,2480 v1(2715,2860) ; 2715,2503.62 cw(c2693.27,2503.62) 2708.64,2488.25 ccw(c2693.27,2503.62) 2715,2503.62 ; 2715,2503.62 ccw(c2736.73,2503.62) 2721.36,2488.25 cw(c2736.73,2503.62) 2715,2503.62 ; 2715,2838.27 cw(c2736.73,2838.27) 2721.36,2853.64 ccw(c2736.73,2838.27) 2715,2838.27 ; 2715,2838.27 ccw(c2693.27,2838.27) 2708.64,2853.64 cw(c2693.27,2838.27) 2715,2838.27
  Top Layer w15: v1(2715,3009) 2824,3009 2843,3028 R87.1@2915.6,3028 ; U16.7@2733.11,3009 cw(c2733.11,3027.11) 2720.3,3014.3 ccw(c2733.11,3027.11) U16.7@2733.11,3009 ; U16.7@2733.11,3009 ccw(c2733.11,2990.89) 2720.3,3003.7 cw(c2733.11,2990.89) U16.7@2733.11,3009 ; 2873.35,3028 cw(c2873.35,2985.75) 2903.22,3015.63 ccw(c2873.35,2985.75) 2873.35,3028 ; 2873.35,3028 ccw(c2873.35,3070.25) 2903.22,3040.37 cw(c2873.35,3070.25) 2873.35,3028
  Bottom Layer w12: v1(2715,2481.89) v1(3385,2481.89) ; v1(2715,2860) v1(2715,3009) ; 2715,2881.73 cw(c2693.27,2881.73) 2708.64,2866.36 ccw(c2693.27,2881.73) 2715,2881.73 ; 2715,2881.73 ccw(c2736.73,2881.73) 2721.36,2866.36 cw(c2736.73,2881.73) 2715,2881.73 ; 2715,2987.27 cw(c2736.73,2987.27) 2721.36,3002.64 ccw(c2736.73,2987.27) 2715,2987.27 ; 2715,2987.27 ccw(c2693.27,2987.27) 2708.64,3002.64 cw(c2693.27,2987.27) 2715,2987.27 ; 2736.73,2481.89 cw(c2736.73,2503.62) 2721.36,2488.25 ccw(c2736.73,2503.62) 2736.73,2481.89 ; 2736.73,2481.89 ccw(c2736.73,2460.16) 2721.36,2475.53 cw(c2736.73,2460.16) 2736.73,2481.89 ; 3363.27,2481.89 cw(c3363.27,2460.16) 3378.64,2475.53 ccw(c3363.27,2460.16) 3363.27,2481.89 ; 3363.27,2481.89 ccw(c3363.27,2503.62) 3378.64,2488.25 cw(c3363.27,2503.62) 3363.27,2481.89
PK1: R10.1 U19.38 | length 346.3
  Top Layer w10: U19.38@3789.61,2403.15 3866.85,2403.15 3895,2375 R10.1@3972.6,2375 ; 3921.81,2375 cw(c3921.81,2326.72) 3955.96,2360.86 ccw(c3921.81,2326.72) 3921.81,2375 ; 3921.81,2375 ccw(c3921.81,2423.28) 3955.96,2389.14 cw(c3921.81,2423.28) 3921.81,2375
PK2: R13.1 U19.37 | length 356
  Top Layer w10: U19.37@3789.61,2383.46 3836.54,2383.46 3925,2295 ; R13.1@3972.6,2295 3925,2295 ; 3925,2295 cw(c3925,2254.16) 3955.27,2281.57 ccw(c3925,2254.16) 3925,2295 ; 3925,2295 ccw(c3925,2335.84) 3955.27,2308.43 cw(c3925,2335.84) 3925,2295
PSW1: R14.1 U19.24 | length 405.4
  Top Layer w10: R14.1@3470,2075 3470,2090 3541.26,2161.26 U19.24@3541.26,2213.86 ; R14.1@3470,2097.5 ccw(c3470,2115.61) 3482.8,2102.8 cw(c3470,2115.61) R14.1@3470,2097.5 ; R14.1@3480,2077.5 cw(c3534.32,2077.5) 3495.91,2115.91 ccw(c3534.32,2077.5) R14.1@3480,2077.5 ; R14.1@3490,2077.5 cw(c3568.46,2077.5) 3512.98,2132.98 ccw(c3568.46,2077.5) R14.1@3490,2077.5
PSW2: R15.1 U19.25 | length 295.1
  Top Layer w10: R15.1@3550,2075 3550,2135 3560.94,2145.94 U19.25@3560.94,2213.86 ; 3550,2125.78 cw(c3501.72,2125.78) 3535.86,2091.64 ccw(c3501.72,2125.78) 3550,2125.78 ; 3550,2125.78 ccw(c3598.28,2125.78) 3564.14,2091.64 cw(c3598.28,2125.78) 3550,2125.78
PWRKEY: R53.1 U19.44 | length 2057.8
  Top Layer w10: U19.44@3789.61,2521.26 v1(3846,2521.26) ; U19.44@3821.86,2521.26 cw(c3821.86,2497.12) 3838.93,2514.19 ccw(c3821.86,2497.12) U19.44@3821.86,2521.26 ; U19.44@3821.86,2521.26 ccw(c3821.86,2545.4) 3838.93,2528.33 cw(c3821.86,2545.4) U19.44@3821.86,2521.26
  Top Layer w12: v1(4410,3115) R53.1@4762.6,3115 ; 4431.73,3115 cw(c4431.73,3136.73) 4416.36,3121.36 ccw(c4431.73,3136.73) 4431.73,3115 ; 4431.73,3115 ccw(c4431.73,3093.27) 4416.36,3108.64 cw(c4431.73,3093.27) 4431.73,3115 ; 4714.23,3115 cw(c4714.23,3069.13) 4746.66,3101.56 ccw(c4714.23,3069.13) 4714.23,3115 ; 4714.23,3115 ccw(c4714.23,3160.87) 4746.66,3128.44 cw(c4714.23,3160.87) 4714.23,3115
  Bottom Layer w12: v1(3846,2521.26) 3891.26,2521.26 3905,2535 4175,2535 4240,2470 4380,2470 4410,2500 v1(4410,3115) ; 3867.73,2521.26 cw(c3867.73,2542.99) 3852.36,2527.62 ccw(c3867.73,2542.99) 3867.73,2521.26 ; 3867.73,2521.26 ccw(c3867.73,2499.53) 3852.36,2514.9 cw(c3867.73,2499.53) 3867.73,2521.26 ; 4410,3093.27 cw(c4431.73,3093.27) 4416.36,3108.64 ccw(c4431.73,3093.27) 4410,3093.27 ; 4410,3093.27 ccw(c4388.27,3093.27) 4403.64,3108.64 cw(c4388.27,3093.27) 4410,3093.27
RUN: LED7.2 U16.6 U19.53 | length 2165
  Top Layer w10: U19.53@3620,2690.87 3620,2730.96 3645,2755.96 LED7.2@3645,2925 ; LED7.2@3615.96,2918.36 cw(c3545.84,2848.24) 3645,2848.24 ccw(c3545.84,2848.24) LED7.2@3615.96,2918.36 ; LED7.2@3623.03,2925.43 cw(c3569.98,2872.38) 3645,2872.38 ccw(c3569.98,2872.38) LED7.2@3623.03,2925.43 ; LED7.2@3630.1,2932.5 cw(c3594.12,2896.52) 3645,2896.52 ccw(c3594.12,2896.52) LED7.2@3630.1,2932.5
  Top Layer w12: U16.6@2770.6,2959 2831,2959 2840,2950 2840,2856 2852,2844 v1(3220,2844) ; v1(3560.1,2850) 3613,2850 3622,2859 LED7.2@3622,2933 ; 2810.58,2959 cw(c2810.58,2973.49) 2800.34,2963.24 ccw(c2810.58,2973.49) 2810.58,2959 ; 2810.58,2959 ccw(c2810.58,2944.51) 2800.34,2954.76 cw(c2810.58,2944.51) 2810.58,2959 ; 3198.27,2844 cw(c3198.27,2822.27) 3213.64,2837.64 ccw(c3198.27,2822.27) 3198.27,2844 ; 3198.27,2844 ccw(c3198.27,2865.73) 3213.64,2850.36 cw(c3198.27,2865.73) 3198.27,2844 ; 3581.83,2850 cw(c3581.83,2871.73) 3566.46,2856.36 ccw(c3581.83,2871.73) 3581.83,2850 ; 3581.83,2850 ccw(c3581.83,2828.27) 3566.46,2843.64 cw(c3581.83,2828.27) 3581.83,2850 ; LED7.2@3616.66,2919.06 cw(c3603.78,2906.18) 3622,2906.18 ccw(c3603.78,2906.18) LED7.2@3616.66,2919.06 ; 3622,2867.08 cw(c3695.52,2867.08) 3643.53,2919.06 ccw(c3695.52,2867.08) 3622,2867.08 ; 3622,2896.05 cw(c3666.55,2896.05) 3635.05,2927.55 ccw(c3666.55,2896.05) 3622,2896.05
  Bottom Layer w12: v1(3220,2844) 3436,2844 3442,2850 v1(3560.1,2850) ; 3241.73,2844 cw(c3241.73,2865.73) 3226.36,2850.36 ccw(c3241.73,2865.73) 3241.73,2844 ; 3241.73,2844 ccw(c3241.73,2822.27) 3226.36,2837.64 cw(c3241.73,2822.27) 3241.73,2844 ; 3538.37,2850 cw(c3538.37,2828.27) 3553.73,2843.64 ccw(c3538.37,2828.27) 3538.37,2850 ; 3538.37,2850 ccw(c3538.37,2871.73) 3553.73,2856.36 cw(c3538.37,2871.73) 3538.37,2850
SCL: R75.1 U19.61 U22.2 | length 2496.5
  Top Layer w10: U19.61@3462.52,2690.87 3462.52,2647.48 3475,2635 v1(3475,2585) ; 3475,2609.14 cw(c3450.86,2609.14) 3467.93,2592.07 ccw(c3450.86,2609.14) 3475,2609.14 ; 3475,2609.14 ccw(c3499.14,2609.14) 3482.07,2592.07 cw(c3499.14,2609.14) 3475,2609.14
  Top Layer w15: U22.2@2239.21,2715 2181,2715 2165,2699 2165,2316 2176,2305 R75.1@2313.21,2305 ; 2165,2566.89 cw(c2183.11,2566.89) 2170.3,2579.7 ccw(c2183.11,2566.89) 2165,2566.89 ; 2165,2566.89 ccw(c2146.89,2566.89) 2159.7,2579.7 cw(c2146.89,2566.89) 2165,2566.89 ; 2165,2603.11 cw(c2146.89,2603.11) 2159.7,2590.3 ccw(c2146.89,2603.11) 2165,2603.11 ; 2165,2603.11 ccw(c2183.11,2603.11) 2170.3,2590.3 cw(c2183.11,2603.11) 2165,2603.11 ; 2268.46,2305 cw(c2268.46,2262.75) 2298.34,2292.63 ccw(c2268.46,2262.75) 2268.46,2305 ; 2268.46,2305 ccw(c2268.46,2347.25) 2298.34,2317.37 cw(c2268.46,2347.25) 2268.46,2305
  Bottom Layer w12: v1(2165,2585) v1(3475,2585) ; 2186.73,2585 cw(c2186.73,2606.73) 2171.36,2591.36 ccw(c2186.73,2606.73) 2186.73,2585 ; 2186.73,2585 ccw(c2186.73,2563.27) 2171.36,2578.64 cw(c2186.73,2563.27) 2186.73,2585 ; 3453.27,2585 cw(c3453.27,2563.27) 3468.64,2578.64 ccw(c3453.27,2563.27) 3453.27,2585 ; 3453.27,2585 ccw(c3453.27,2606.73) 3468.64,2591.36 cw(c3453.27,2606.73) 3453.27,2585
SDA: R76.1 U19.62 U22.13 | length 2159.9
  Top Layer w10: v1(3442.83,2622.17) U19.62@3442.83,2690.87 ; 3442.83,2646.31 cw(c3418.69,2646.31) 3435.76,2629.24 ccw(c3418.69,2646.31) 3442.83,2646.31 ; 3442.83,2646.31 ccw(c3466.98,2646.31) 3449.91,2629.24 cw(c3466.98,2646.31) 3442.83,2646.31
  Top Layer w15: R76.1@2408,2223 2562,2223 2574,2235 2574,2704 2563,2715 U22.13@2469.21,2715 ; 2452.75,2223 cw(c2452.75,2265.25) 2422.87,2235.37 ccw(c2452.75,2265.25) 2452.75,2223 ; 2452.75,2223 ccw(c2452.75,2180.75) 2422.87,2210.63 cw(c2452.75,2180.75) 2452.75,2223 ; v1@2569.7,2616.86 cw(c2559.31,2606.47) 2574,2606.47 ccw(c2559.31,2606.47) v1@2569.7,2616.86 ; v1@2569.7,2627.47 ccw(c2559.31,2637.86) 2574,2637.86 cw(c2559.31,2637.86) v1@2569.7,2627.47 ; 2574,2601.64 cw(c2595.52,2601.64) 2580.3,2616.86 ccw(c2595.52,2601.64) 2574,2601.64 ; 2574,2642.69 ccw(c2595.52,2642.69) 2580.3,2627.47 cw(c2595.52,2642.69) 2574,2642.69
  Bottom Layer w10: v1(2575,2622.17) v1(3442.83,2622.17) ; 2599.14,2622.17 cw(c2599.14,2646.31) 2582.07,2629.24 ccw(c2599.14,2646.31) 2599.14,2622.17 ; 2599.14,2622.17 ccw(c2599.14,2598.02) 2582.07,2615.09 cw(c2599.14,2598.02) 2599.14,2622.17 ; 3418.69,2622.17 cw(c3418.69,2598.02) 3435.76,2615.09 ccw(c3418.69,2598.02) 3418.69,2622.17 ; 3418.69,2622.17 ccw(c3418.69,2646.31) 3435.76,2629.24 cw(c3418.69,2646.31) 3418.69,2622.17
SEL_NRST: J9.2 R41.2 U15.1 | length 2765.7
  Top Layer w12: v1(3125,2758) 3361,2758 3372,2747 3372,2561 3383,2550 3658,2550 3812,2704 4146,2704 4165,2685 4165,2437.6 J9.2@4282.6,2320 ; 3146.73,2758 cw(c3146.73,2779.73) 3131.36,2764.36 ccw(c3146.73,2779.73) 3146.73,2758 ; 3146.73,2758 ccw(c3146.73,2736.27) 3131.36,2751.64 cw(c3146.73,2736.27) 3146.73,2758 ; 4239.92,2362.68 cw(c4197.24,2320) 4257.6,2320 ccw(c4197.24,2320) 4239.92,2362.68 ; 4239.92,2362.68 ccw(c4282.6,2405.36) 4282.6,2345 cw(c4282.6,2405.36) 4239.92,2362.68 ; 4260.41,2342.19 cw(c4238.21,2320) 4269.6,2320 ccw(c4238.21,2320) 4260.41,2342.19 ; 4260.41,2342.19 ccw(c4282.6,2364.38) 4282.6,2333 cw(c4282.6,2364.38) 4260.41,2342.19
  Top Layer w15: R41.2@3075.6,2933 3075.6,2889.4 ; U15.1@3165.6,2929 3165.6,2890.6 3155,2880 3085,2880 3075.6,2889.4 ; 3075.6,2889.4 cw(c3115.1,2889.4) 3087.73,2917.88 ccw(c3115.1,2889.4) 3075.6,2889.4 ; 3075.6,2889.4 ccw(c3036.1,2889.4) 3063.47,2917.88 cw(c3036.1,2889.4) 3075.6,2889.4 ; 3106.89,2880 cw(c3106.89,2861.89) 3119.7,2874.7 ccw(c3106.89,2861.89) 3106.89,2880 ; 3106.89,2880 ccw(c3106.89,2898.11) 3119.7,2885.3 cw(c3106.89,2898.11) 3106.89,2880 ; 3143.11,2880 cw(c3143.11,2898.11) 3130.3,2885.3 ccw(c3143.11,2898.11) 3143.11,2880 ; 3143.11,2880 ccw(c3143.11,2861.89) 3130.3,2874.7 cw(c3143.11,2861.89) 3143.11,2880
  Bottom Layer w12: v1@3125,2749 v1(3125,2880) ; 3125,2779.73 cw(c3103.27,2779.73) 3118.64,2764.36 ccw(c3103.27,2779.73) 3125,2779.73 ; 3125,2779.73 ccw(c3146.73,2779.73) 3131.36,2764.36 cw(c3146.73,2779.73) 3125,2779.73 ; 3125,2858.27 cw(c3146.73,2858.27) 3131.36,2873.64 ccw(c3146.73,2858.27) 3125,2858.27 ; 3125,2858.27 ccw(c3103.27,2858.27) 3118.64,2873.64 cw(c3103.27,2858.27) 3125,2858.27
SPICS: U19.20 U20.1 | length 1848.2
  Top Layer w10: U19.20@3462.52,2213.86 v1(3462.52,2313) ; 3462.52,2288.86 cw(c3486.66,2288.86) 3469.59,2305.93 ccw(c3486.66,2288.86) 3462.52,2288.86 ; 3462.52,2288.86 ccw(c3438.38,2288.86) 3455.45,2305.93 cw(c3438.38,2288.86) 3462.52,2288.86
  Top Layer w15: U20.1@2627.6,1654.22 v1(2689.22,1654.22) ; 2671.11,1654.22 cw(c2671.11,1636.11) 2683.92,1648.92 ccw(c2671.11,1636.11) 2671.11,1654.22 ; 2671.11,1654.22 ccw(c2671.11,1672.33) 2683.92,1659.52 cw(c2671.11,1672.33) 2671.11,1654.22
  Bottom Layer w12: v1(2689.22,1654.22) 2689.22,2289.22 2713,2313 v1(3462.52,2313) ; 2689.22,1675.95 cw(c2667.49,1675.95) 2682.86,1660.58 ccw(c2667.49,1675.95) 2689.22,1675.95 ; 2689.22,1675.95 ccw(c2710.95,1675.95) 2695.58,1660.58 cw(c2710.95,1675.95) 2689.22,1675.95 ; 3440.79,2313 cw(c3440.79,2291.27) 3456.16,2306.64 ccw(c3440.79,2291.27) 3440.79,2313 ; 3440.79,2313 ccw(c3440.79,2334.73) 3456.16,2319.36 cw(c3440.79,2334.73) 3440.79,2313